# EAGLE board MarkGalperin_me433 (EAGLE 9.3.0)
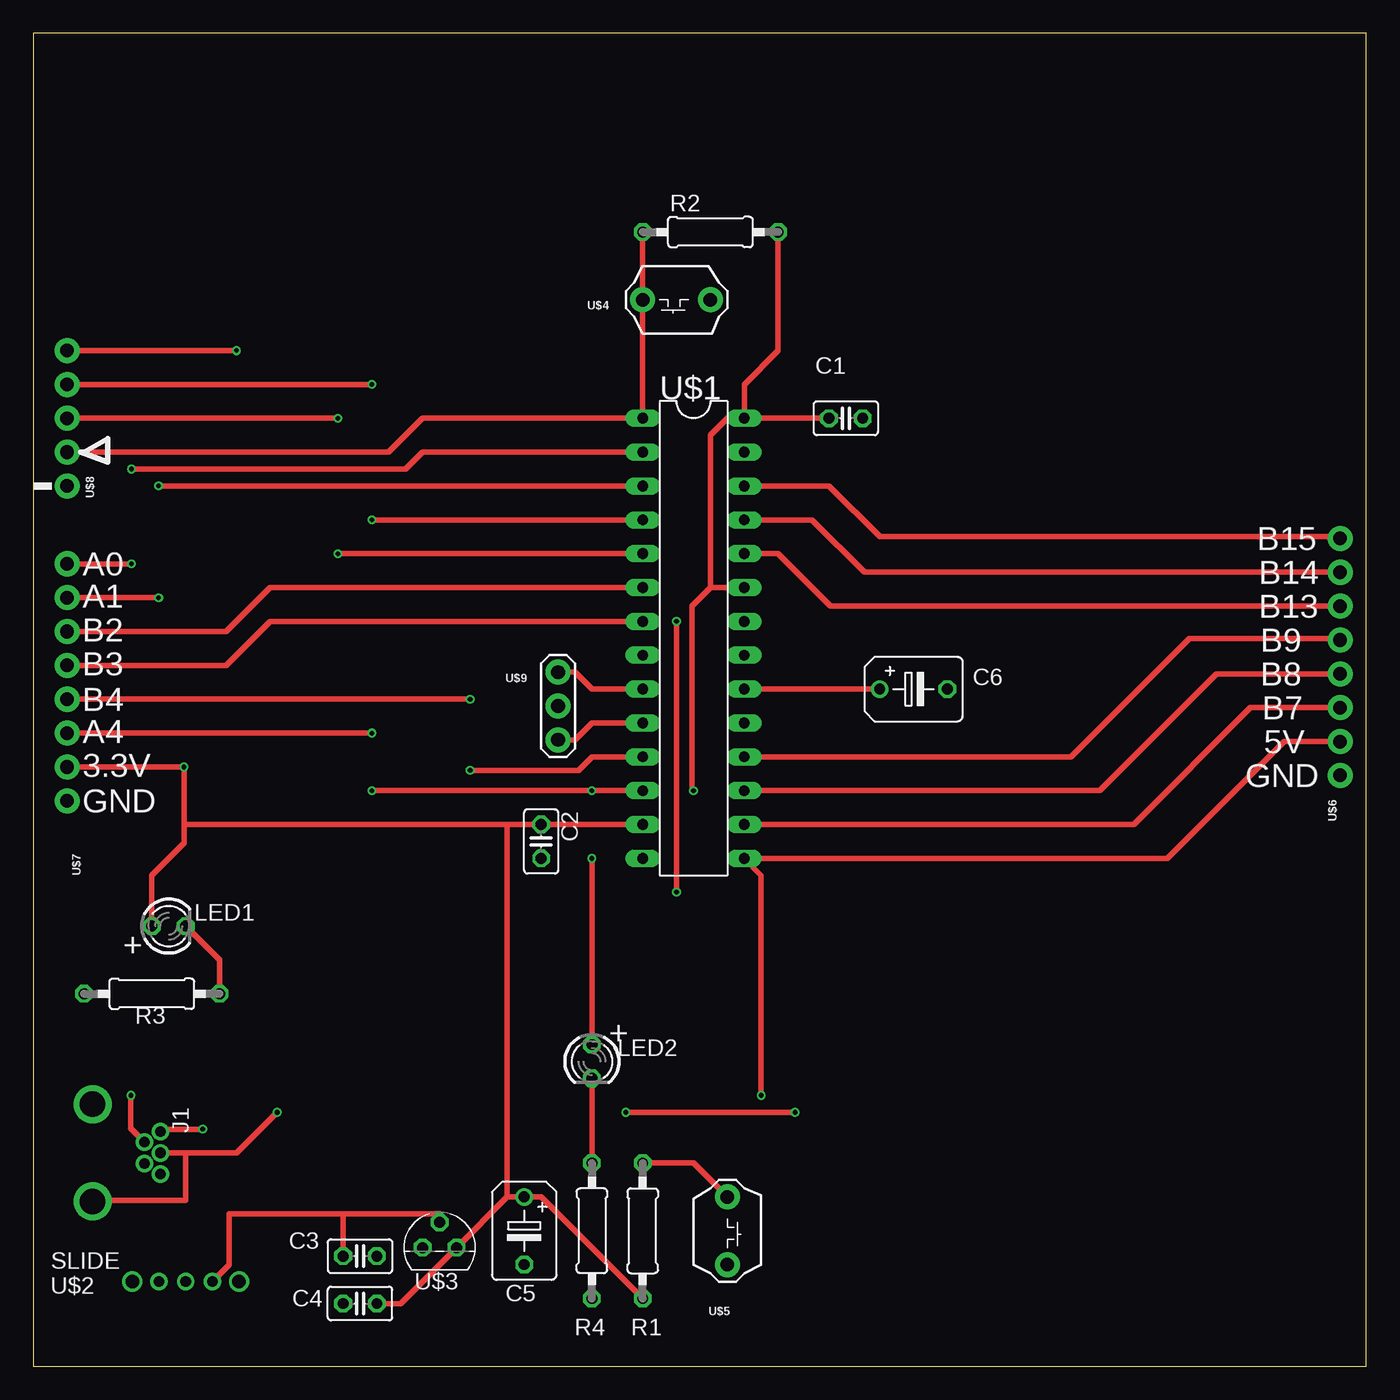
[diagram p0: board, top side]
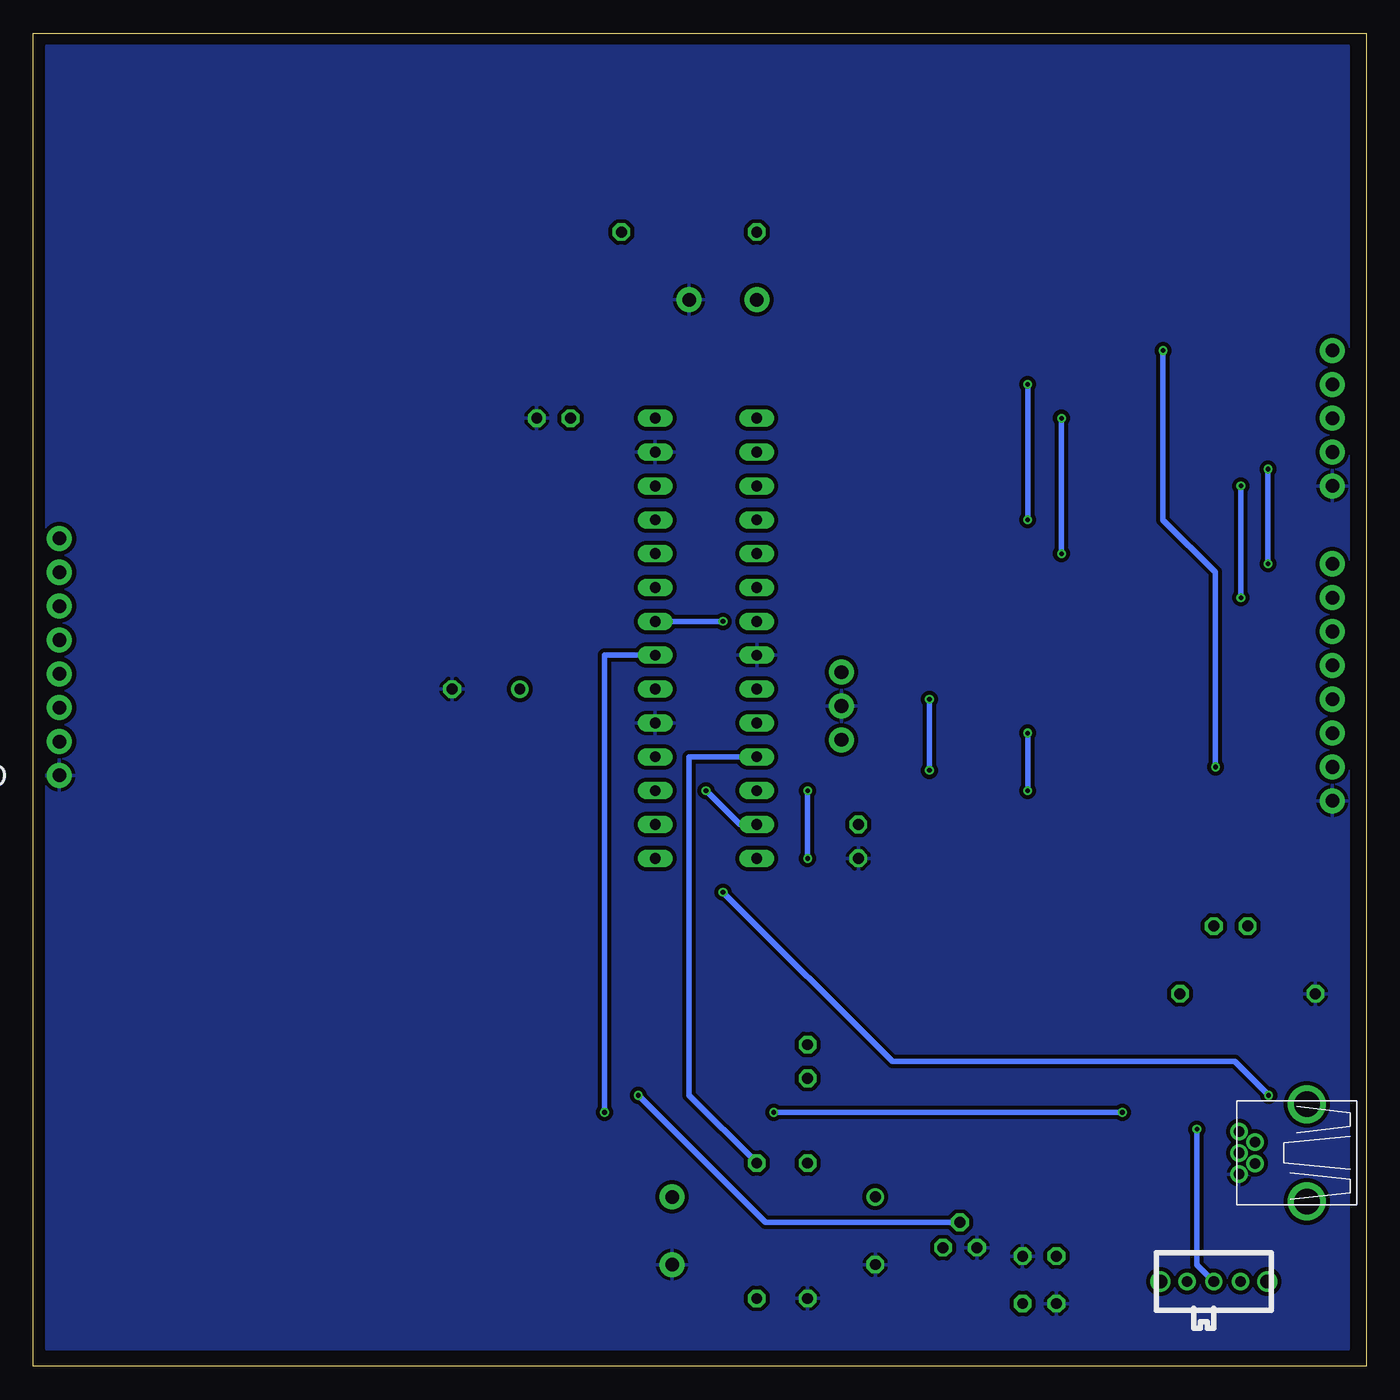
[diagram p1: board, bottom side, seen from below]

Size 100 x 100 mm. Coordinates in mm from the lower left corner, seen from the top.
Outline: 0,0 100,0 100,100 0,100 0,0
Copper layers (1*16): Top 0.035mm / dielectric 1.5mm / Bottom 0.035mm
Design rules "SeeedStudio_2layer_DRU_no_angle_20140221": minimum track width 6mil, minimum drill 12mil, track to track 6mil, track to pad 6mil, pad to pad 6mil, via to via 6mil, smd to smd 0mil, copper to edge 10mil, drill to drill 10mil, minimum pad ring 10mil, minimum via ring 6mil, stop-mask expansion 2mil, vias tented up to drill 100mil, thermal gap 10mil

## Footprints (pad centres in the part's own frame; a part is rotated, then mirrored left to right if it is on the bottom)
C025-025X050 = drill 0.813 octagon: 1 -1.27,0; 2 1.27,0
B45181B = drill 0.813: + -2.54,0 | drill 0.813 octagon: - 2.54,0
USB-MB-H = drill 0.8: D+ 5.1,0; D- 3.9,0.8; GND 5.1,-1.6; ID 3.9,-0.8; VBUS 5.1,1.6 | drill 1.9: P$6 0,-3.65; P$7 0,3.65
LED3MM = drill 0.813 octagon: A -1.27,0; K 1.27,0
0207/10 = drill 0.813 octagon: 1 -5.08,0; 2 5.08,0
DIL28-3 = drill 0.813 long: 1 -16.51,-3.81; 2 -13.97,-3.81; 3 -11.43,-3.81; 4 -8.89,-3.81; 5 -6.35,-3.81; 6 -3.81,-3.81; 7 -1.27,-3.81; 8 1.27,-3.81; 9 3.81,-3.81; 10 6.35,-3.81; 11 8.89,-3.81; 12 11.43,-3.81; 13 13.97,-3.81; 14 16.51,-3.81; 15 16.51,3.81; 16 13.97,3.81; 17 11.43,3.81; 18 8.89,3.81; 19 6.35,3.81; 20 3.81,3.81; 21 1.27,3.81; 22 -1.27,3.81; 23 -3.81,3.81; 24 -6.35,3.81; 25 -8.89,3.81; 26 -11.43,3.81; 27 -13.97,3.81; 28 -16.51,3.81
SLIDE = drill 0.8: 1 -2,0; 2 0,0; 3 2,0 | drill 1: P$1 -4,0; P$2 4,0
TO92 = drill 0.813 octagon: 1 -1.27,0; 2 0,1.905; 3 1.27,0
PB = drill 1.016 pad 1.88: 1 -5.08,1.27; 2 0,1.27
1X08 = drill 1.016 pad 1.88: 1 0,0; 2 2.54,0; 3 5.08,0; 4 7.62,0; 5 10.16,0; 6 12.7,0; 7 15.24,0; 8 17.78,0
1X05 = drill 1.016 pad 1.88: 1 0,0; 2 2.54,0; 3 5.08,0; 4 7.62,0; 5 10.16,0
OSC = drill 1.016 pad 1.88: 1 -2.54,2.54; 2 0,2.54; 3 2.54,2.54

## Placement (x,y rotation side)
C1  0.1uF  [C025-025X050]  60.96,71.12 0 top
C2  0.1uF  [C025-025X050]  38.1,39.37 270 top
C3  0.1uF  [C025-025X050]  24.51,8.26 0 top
C4  0.1uF  [C025-025X050]  24.51,4.7 180 top
C5  10uF  [B45181B]  36.83,10.16 270 top
C6  10uF  [B45181B]  66.04,50.8 0 top
J1  USB-MB-H  [USB-MB-H]  4.45,16 0 top
LED1  Red  [LED3MM]  10.16,33.02 0 top
LED2  Green  [LED3MM]  41.91,22.86 270 top
R1  10k  [0207/10]  45.72,10.16 270 top
R2  10k  [0207/10]  50.8,85.09 0 top
R3  330  [0207/10]  8.89,27.94 0 top
R4  330  [0207/10]  41.91,10.16 90 top
U$1  PIC32MX250F128B  [DIL28-3]  49.53,54.61 270 top
U$2  SLIDE  [SLIDE]  11.43,6.35 180 bottom
U$3  MCP1702  [TO92]  30.48,8.89 0 top
U$4  RESET  [PB]  45.72,81.28 180 top
U$5  USER  [PB]  50.8,7.62 270 top
U$6  CONN_08  [1X08]  98.04,44.32 90 top
U$7  CONN_08  [1X08]  2.54,42.42 90 top
U$8  SNAP  [1X05]  2.54,66.04 90 top
U$9  8 MHz  [OSC]  36.83,49.53 270 top

## Library data of the parts
C1-C6 = rcl; SPICEPREFIX: C
J1 U$1-U$9 = MarkGalperin_me433_library
LED1 LED2 = led
R1-R4 = rcl; SPICEPREFIX: R

## Nets
+3V3: C1.1 C2.1 C4.1 C5.+ LED1.A R1.2 R2.2 U$1.13 U$1.23 U$1.28 U$3.3 U$7.2 U$8.5
+5V: C3.1 U$1.15 U$2.3 U$3.2 U$6.2
A0: U$1.2 U$7.8
A1: U$1.3 U$7.7
A4/LED: LED2.A U$1.12 U$7.3
B2: U$1.6 U$7.6
B3: U$1.7 U$7.5
B4/USER: R1.1 U$1.11 U$5.1 U$7.4
B7: U$1.16 U$6.3
B8: U$1.17 U$6.4
B9: U$1.18 U$6.5
B13: U$1.24 U$6.6
B14: U$1.25 U$6.7
B15: U$1.26 U$6.8
D+: J1.D+ J1.P$6 U$1.21
D-: J1.D- U$1.22
GND: C1.2 C2.2 C3.2 C4.2 C5.- C6.- J1.GND R3.1 R4.1 U$1.8 U$1.19 U$1.27 U$3.1 U$4.1 U$5.2 U$6.1 U$7.1 U$8.1 U$9.2
MCLR: R2.1 U$1.1 U$4.2 U$8.2
N$1: J1.VBUS U$2.2
N$2: U$1.10 U$9.3
N$3: LED1.K R3.2
N$4: LED2.K R4.2
N$5: U$1.9 U$9.1
N$6: C6.+ U$1.20
PGC: U$1.5 U$8.3
PGD: U$1.4 U$8.4
USBID: J1.ID
USBID/B5: U$1.14

## Tracks (layer width: path | path; a pad name or v marks a point on that pad's centre or on a via)
+3V3  (via drill 0.35)
  Top 0.406: U$8.5 v15.24,76.2 | U$7.2 v11.3,44.96 11.3,40.64 | 11.3,40.64 11.3,39.24 8.89,36.83 LED1.A | U$1.13 C2.1 35.56,40.64 | 35.56,40.64 11.3,40.64 | U$1.28 53.34,73.66 55.88,76.2 R2.2 | U$1.28 C1.1 | U$1.28 52.07,71.12 50.8,69.85 50.8,58.42 | 50.8,58.42 U$1.23 | 50.8,58.42 49.4,57.02 49.4,43.31 v49.53,43.18 | C4.1 27.56,4.7 U$3.3 35.56,12.7 | 35.56,12.7 C5.+ 38.1,12.7 R1.2 | 35.56,40.64 35.56,12.7
  Bottom 0.406: v15.24,76.2 15.24,63.5 11.3,59.56 v11.3,44.96 | v49.53,43.18 46.99,40.64 U$1.13
+5V  (via drill 0.35)
  Top 0.406: U$2.3 14.7,7.62 14.7,11.43 23.24,11.43 | U$3.2 30.48,11.43 23.24,11.43 | C3.1 23.24,11.43 | v54.61,20.32 54.61,36.83 U$1.15 85.09,38.1 93.85,46.86 U$6.2
  Bottom 0.406: U$3.2 45.09,10.79 v54.61,20.32
A0  (via drill 0.35)
  Top 0.406: U$7.8 v7.37,60.2 | v7.37,67.31 27.94,67.31 29.21,68.58 U$1.2
  Bottom 0.406: v7.37,60.2 v7.37,67.31
A1  (via drill 0.35)
  Top 0.406: U$7.7 v9.4,57.66 | v9.4,66.04 U$1.3
  Bottom 0.406: v9.4,57.66 v9.4,66.04
A4/LED  (via drill 0.35)
  Top 0.406: U$7.3 v25.4,47.5 | v25.4,43.18 v41.91,43.18 U$1.12 | LED2.A v41.91,38.1
  Bottom 0.406: v25.4,47.5 v25.4,43.18 | v41.91,38.1 v41.91,43.18
B2
  Top 0.406: U$7.6 14.48,55.12 17.78,58.42 U$1.6
B3
  Top 0.406: U$7.5 14.48,52.58 17.78,55.88 U$1.7
B4/USER  (via drill 0.35)
  Top 0.406: U$7.4 v32.77,50.04 | v32.77,44.7 40.89,44.7 41.91,45.72 U$1.11 | U$5.1 49.53,15.24 R1.1
  Bottom 0.406: v32.77,50.04 v32.77,44.7 | U$1.11 50.8,45.72 50.8,20.32 R1.1
B7
  Top 0.406: U$1.16 82.55,40.64 91.31,49.4 91.44,49.4 U$6.3
B8
  Top 0.406: U$1.17 80.01,43.18 88.77,51.94 U$6.4
B9
  Top 0.406: U$1.18 77.85,45.72 86.74,54.61 98.04,54.61 U$6.5
B13
  Top 0.406: U$6.6 59.82,57.02 55.88,60.96 U$1.24
B14
  Top 0.406: U$1.25 58.42,63.5 62.36,59.56 U$6.7
B15
  Top 0.406: U$6.8 97.92,62.23 63.5,62.23 59.69,66.04 U$1.26
D+  (via drill 0.35)
  Top 0.406: J1.P$6 4.54,12.45 11.43,12.45 11.43,16 | 11.43,16 15.24,16 v18.29,19.05 | 11.43,16 J1.D+ | v44.45,19.05 v57.15,19.05
  Bottom 0.406: v44.45,19.05 v18.29,19.05 | v57.15,19.05 57.15,53.34 U$1.21
D-  (via drill 0.35)
  Top 0.406: v48.26,55.88 v48.26,35.56 | v7.32,20.32 7.32,17.83 J1.D-
  Bottom 0.406: U$1.22 v48.26,55.88 | v48.26,35.56 35.56,22.86 9.86,22.86 v7.32,20.32
GND
  pour Bottom (isolate 0.305): 1.27,99.06 99.06,99.06 99.06,1.27 1.27,1.27
MCLR
  Top 0.406: U$8.2 26.67,68.58 29.21,71.12 U$1.1 U$4.2 R2.1
N$1  (via drill 0.35)
  Top 0.406: J1.VBUS 9.54,17.78 v12.7,17.78
  Bottom 0.406: v12.7,17.78 12.7,7.62 U$2.2
N$2
  Top 0.406: U$1.10 41.91,48.26 40.64,46.99 U$9.3
N$3
  Top 0.406: LED1.K 13.97,30.48 R3.2
N$4
  Top 0.406: LED2.K R4.2
N$5
  Top 0.406: U$9.1 40.64,52.07 41.91,50.8 U$1.9
N$6
  Top 0.406: U$1.20 C6.+
PGC  (via drill 0.35)
  Top 0.406: U$8.3 v22.86,71.12 | v22.86,60.96 U$1.5
  Bottom 0.406: v22.86,71.12 v22.86,60.96
PGD  (via drill 0.35)
  Top 0.406: U$8.4 v25.4,73.66 | v25.4,63.5 U$1.4
  Bottom 0.406: v25.4,73.66 v25.4,63.5

## Text on the board
tPlace: B15 | A0 | B14 | A1 | B13 | B2 | B9 | B3 | B8 | B4 | B7 | A4 | 5V | 3.3V | GND | GND | + | +
bPlace: B15 | B14 | B13 | B9 | B8 | B7 | 5V | GND